# EAGLE board Atmoscan-ng (EAGLE 7.5.0)
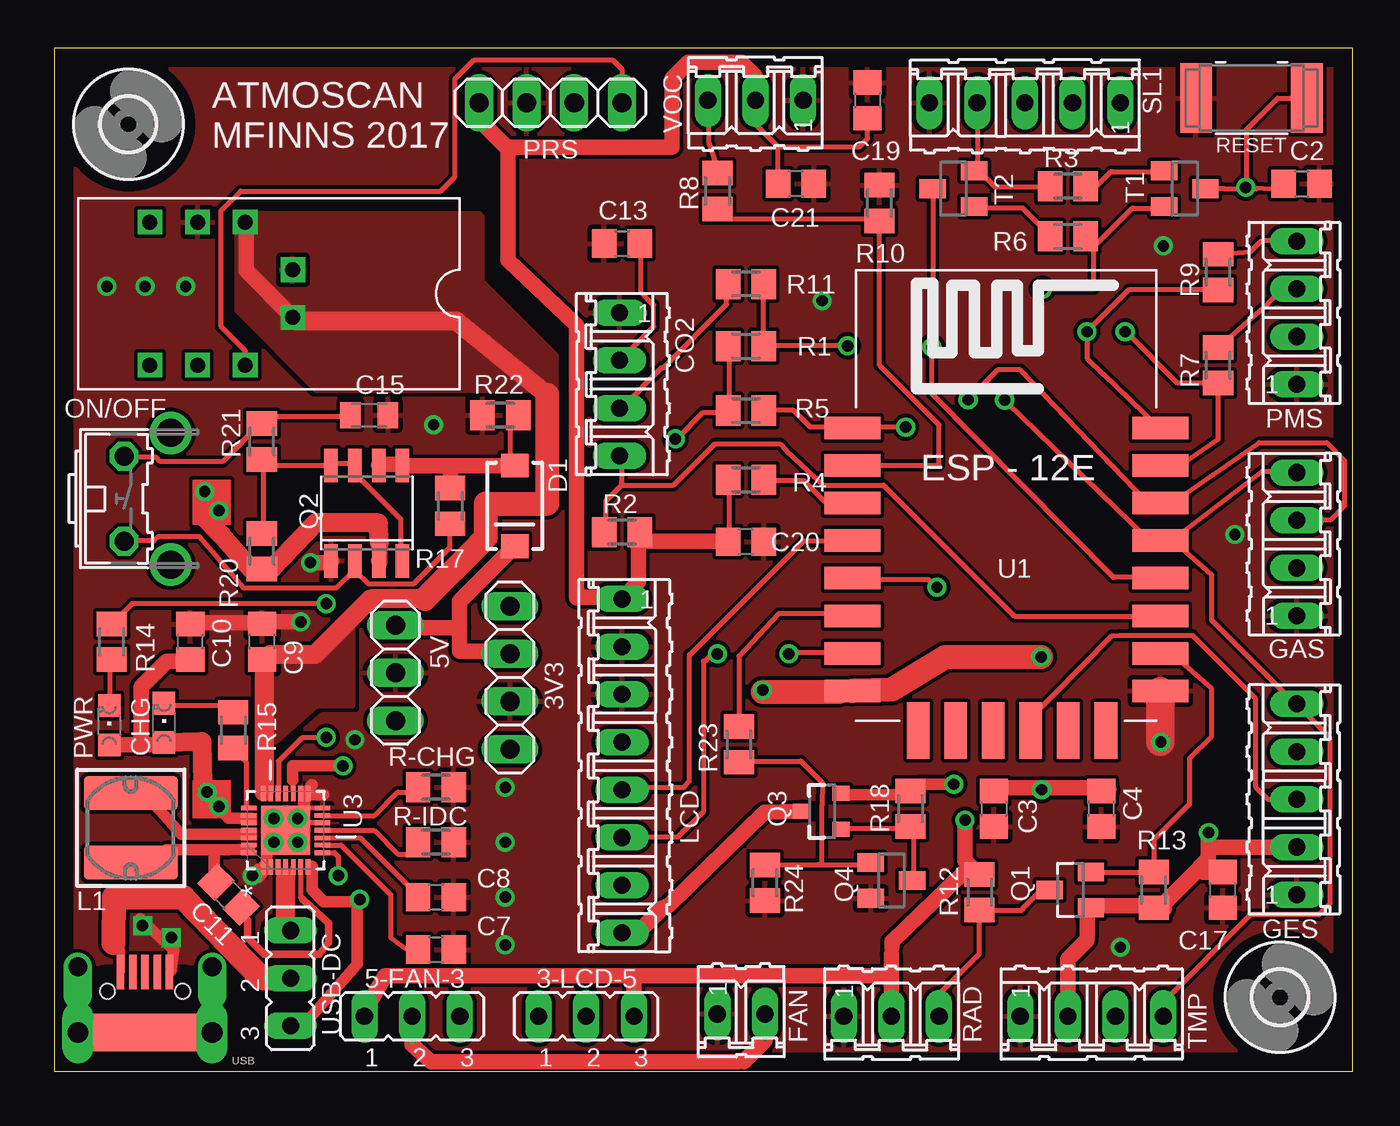
[diagram p0: board, top side]
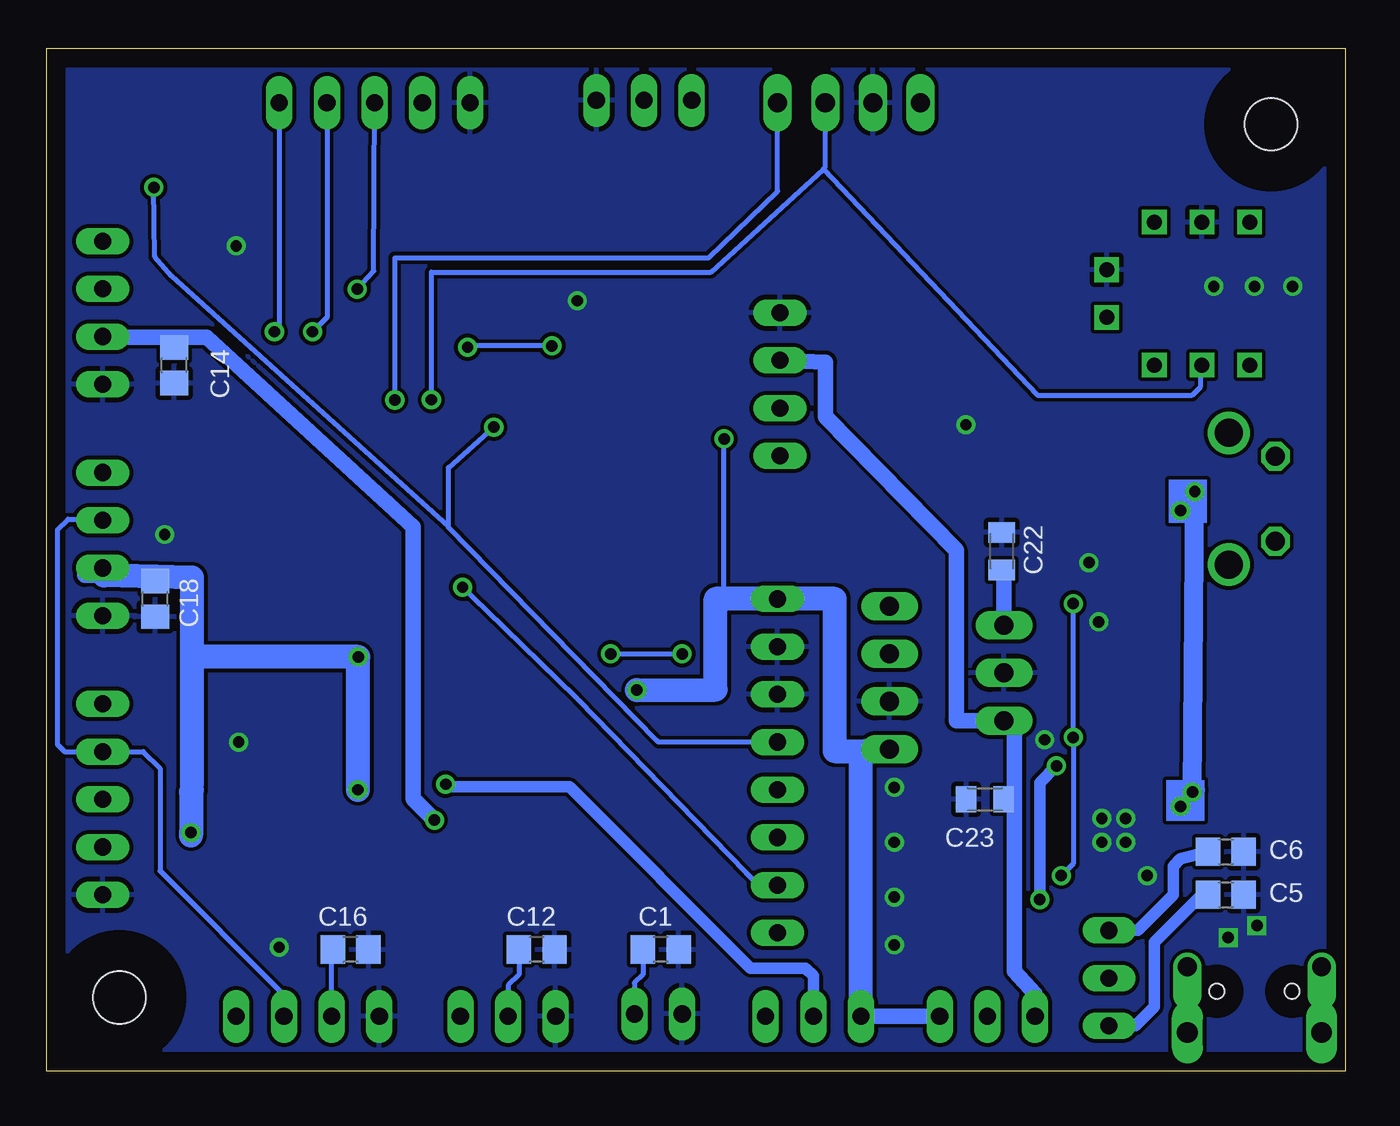
[diagram p1: board, bottom side, seen from below]

Size 69.14 x 54.47 mm. Coordinates in mm from the lower left corner, seen from the top.
Outline: 69.14,0 69.14,54.47 0,54.47 0,0 69.14,0
Copper layers (1*16): Top 0.035mm / dielectric 1.5mm / Bottom 0.035mm
Design rules "default": minimum track width 10mil, minimum drill 24mil, track to track 8mil, track to pad 8mil, pad to pad 8mil, via to via 8mil, smd to smd 8mil, copper to edge 40mil, drill to drill 8mil, minimum pad ring 10mil, minimum via ring 8mil, stop-mask expansion 4mil, vias tented up to drill 0mil, thermal gap 10mil
Net classes: 1 power: width 0.61 mm; 2 hipower: width 0.813 mm

## Footprints (pad centres in the part's own frame; a part is rotated, then mirrored left to right if it is on the bottom)
JP2 = drill 0.914 long: 1 -2.54,0; 2 0,0; 3 2.54,0
1X04 = drill 1.016 long: 1 -3.81,0; 2 -1.27,0; 3 1.27,0; 4 3.81,0
1X03 = drill 1.016 long: 1 -2.54,0; 2 0,0; 3 2.54,0
C0805 = smd 1.3 x 1.5: 1 -0.95,0; 2 0.95,0
C0805K = smd 1.1 x 1.4: 1 -1,0; 2 1,0
CHIPLED_0805 = smd 1.2 x 1.2: A 0,-1.05; C 0,1.05
04P = drill 0.914 long: 1 -3.81,0; 2 -1.27,0; 3 1.27,0; 4 3.81,0
SMA-403D = smd 1.27 x 1.47: A -2.15,0; C 2.15,0
02P = drill 0.914 long: 1 -1.27,0; 2 1.27,0
05P = drill 0.914 long: 1 -5.08,0; 2 -2.54,0; 3 0,0; 4 2.54,0; 5 5.08,0
SDR0503 = smd 5 x 1.8: 1 0,1.85; 2 0,-1.85
08P = drill 0.914 long: 1 -8.89,0; 2 -6.35,0; 3 -3.81,0; 4 -1.27,0; 5 1.27,0; 6 3.81,0; 7 6.35,0; 8 8.89,0
B3F-31XX = drill 1.016 octagon: 1 -2.261,-1.245; 2 2.261,-1.245 | drill 1.499 pad 2.159: 3 -3.505,1.245; 4 3.505,1.245
SOT-23 = smd 1 x 1.4: 1 -0.95,-1.1; 2 0.95,-1.1; 3 0,1.1
SO08-IRF = smd 0.72 x 1.78: 1 -1.905,-2.543; 2 -0.635,-2.543; 3 0.635,-2.543; 4 1.905,-2.543; 5 1.905,2.543; 6 0.635,2.543; 7 -0.635,2.543; 8 -1.905,2.543
SOT23-3 = smd 0.8 x 0.9: 1 -0.95,-1; 2 0.95,-1; 3 0,1.1
SOT23 = smd 1 x 1.4: 1 -0.95,-1.1; 2 0.95,-1.1; 3 0,1.1
M0805 = smd 1.3 x 1.6: 1 -0.95,0; 2 0.95,0
03P = drill 0.914 long: 1 -2.54,0; 2 0,0; 3 2.54,0
BTN_CK_KSS = smd 1.7 x 3.7: P$1 -2.95,0; P$2 2.95,0
ESP12E-SMD = smd 3 x 1.2: ADC -8.3,3.8; CH_PD -8.3,1.8; GND 8.1,-8.2; GPIO0 8.1,-2.2; GPIO2 8.1,-4.2; GPIO4 8.1,-0.2; GPIO5 8.1,1.8; GPIO12 -8.3,-4.2; GPIO13 -8.3,-6.2; GPIO14 -8.3,-2.2; GPIO15 8.1,-6.2; GPIO16 -8.3,-0.2; RESET -8.3,5.8; RXD0 8.1,3.8; TXD0 8.1,5.8; VCC -8.3,-8.2 | smd 1.2 x 3: CS0 -4.8,-10.3; GPIO9 -0.8,-10.3; GPIO10 1.2,-10.3; MISO -2.8,-10.3; MOSI 3.2,-10.3; SCLK 5.2,-10.3
TOL-10617 = drill 0.8 square: ALT -3.81,-12.7; GND -3.81,-10.16; GND1 -1.27,-5.08; QST 3.81,-12.7; SCL 3.81,-10.16; SDA 3.81,-7.62; VBAT -3.81,-7.62; VBAT1 1.27,-5.08
QFN40P400X400X80-29N = smd 0.813 x 0.254: 1 -1.956,1.194; 2 -1.956,0.787; 3 -1.956,0.406; 4 -1.956,0; 5 -1.956,-0.406; 6 -1.956,-0.787; 7 -1.956,-1.194; 15 1.956,-1.194; 16 1.956,-0.787; 17 1.956,-0.406; 18 1.956,0; 19 1.956,0.406; 20 1.956,0.787; 21 1.956,1.194 | smd 0.254 x 0.813: 8 -1.194,-1.956; 9 -0.787,-1.956; 10 -0.406,-1.956; 11 0,-1.956; 12 0.406,-1.956; 13 0.787,-1.956; 14 1.194,-1.956; 22 1.194,1.956; 23 0.787,1.956; 24 0.406,1.956; 25 0,1.956; 26 -0.406,1.956; 27 -0.787,1.956; 28 -1.194,1.956 | smd 2.591 x 2.591: 29 0,0
2,8 = hole 2.8: 0,0
MICRO_USB_4_LEGS = smd 1.85 x 0.4: D+ 3.125,0; D- 3.125,0.65; GND 3.125,-1.3; ID 3.125,-0.65; VCC 3.125,1.3 | drill 1.1 pad 1.5 long: P$1 -0.1,3.575; P$2 -0.1,-3.575 | drill 1 pad 1.5 offset: P$3 3.4,3.575; P$5 3.4,-3.575 | smd 2 x 6: P$4 -0.1,0 | hole 0.8: 2.1,2; 2.1,-2

## Placement (x,y rotation side)
3-LCD-5  3-LCD-5  [JP2]  28.32,2.92 0 top
3V3  S7V8V3  [1X04]  24.26,20.95 270 top
5-FAN-3  5-FAN-3  [JP2]  19.05,2.92 0 top
5V  U1V10F5  [1X03]  18.16,21.21 270 top
C1  100nF  [C0805]  36.45,6.48 180 bottom
C2  100nF  [C0805]  66.42,47.24 0 top
C3  100uF  [C0805]  50.04,13.97 270 top
C4  100nF  [C0805]  55.75,13.97 90 top
C5  10uF  [C0805]  6.35,9.4 0 bottom
C6  10uF  [C0805]  6.35,11.68 0 bottom
C7  1uF  [C0805]  20.32,6.48 0 top
C8  150nF  [C0805]  20.32,9.27 0 top
C9  10uF  [C0805]  11.07,22.87 90 top
C10  10uF  [C0805]  7.24,22.86 90 top
C11  100nF  [C0805]  9.27,9.4 135 top
C12  100nF  [C0805]  43.05,6.48 180 bottom
C13  100nF  [C0805]  30.23,44.07 0 top
C14  100nF  [C0805]  62.36,37.59 90 bottom
C15  1uF  [C0805K]  16.76,34.92 0 top
C16  100nF  [C0805]  52.96,6.48 180 bottom
C17  100nF  [C0805]  62.23,9.65 90 top
C18  100nF  [C0805]  63.37,25.15 90 bottom
C19  100nF  [C0805]  43.31,51.69 270 top
C20  100nF  [C0805]  36.83,28.19 180 top
C21  100nF  [C0805]  39.5,47.24 180 top
C22  100uF  [C0805K]  18.29,27.69 90 bottom
C23  100uF  [C0805K]  19.18,14.48 180 bottom
CHG  CHG  [CHIPLED_0805]  5.84,18.54 0 top
CO2  J1  [04P]  30.1,36.58 270 top
D1  Shottky  [SMA-403D]  24.51,30.1 270 top
FAN  J7  [02P]  36.58,3.05 0 top
GAS  J3  [04P]  66.17,28.07 90 top
GES  J9  [05P]  66.17,14.48 90 top
L1  2.2uH  [SDR0503]  4.06,12.95 180 top
LCD  J6  [08P]  30.23,16.26 270 top
ON/OFF  SW2  [B3F-31XX]  4.95,30.48 270 top
PMS  J2  [04P]  66.17,40.39 90 top
PRS  J5  [1X04]  26.42,51.56 180 top
PWR  PWR  [CHIPLED_0805]  2.92,18.41 0 top
Q1  SI2302  [SOT-23]  54.1,9.65 90 top
Q2  IRF7319  [SO08-IRF]  16.64,29.72 0 top
Q3  SI2303  [SOT23-3]  40.89,13.84 90 top
Q4  SI2302  [SOT23]  44.58,10.16 270 top
R1  12K  [M0805]  36.83,38.61 180 top
R2  12K  [M0805]  30.23,28.7 0 top
R3  12K  [M0805]  53.98,47.12 0 top
R4  12K  [M0805]  36.83,31.5 180 top
R5  12K  [M0805]  36.83,35.18 180 top
R6  12K  [M0805]  53.98,44.45 180 top
R7  470  [M0805]  61.98,37.59 270 top
R8  220K  [M0805]  35.31,46.86 90 top
R9  470  [M0805]  61.98,42.55 270 top
R10  100K  [M0805]  43.94,46.23 270 top
R11  470  [M0805]  36.83,41.91 0 top
R12  10K  [M0805]  49.28,9.53 90 top
R13  10K  [M0805]  58.55,9.65 270 top
R14  560  [M0805]  3.05,22.86 270 top
R15  560  [M0805]  9.53,18.16 90 top
R17  10K  [M0805]  21.08,30.1 90 top
R18  470K  [M0805]  45.59,13.97 90 top
R20  10K  [M0805]  11.05,27.69 270 top
R21  100K  [M0805]  11.05,33.53 270 top
R22  10K  [M0805]  23.75,34.92 0 top
R23  22K  [M0805]  36.45,17.4 90 top
R24  470K  [M0805]  37.85,10.03 270 top
R-CHG  600  [M0805]  20.32,15.11 0 top
R-IDC  3K  [M0805]  20.32,12.19 0 top
RAD  J10  [03P]  44.58,2.92 0 top
RESET  SW2  [BTN_CK_KSS]  63.75,51.82 180 top
SL1  J7  [05P]  51.69,51.56 180 top
T1  S8050  [SOT23]  60.2,46.99 270 top
T2  S8050  [SOT23]  47.88,46.99 90 top
TMP  J4  [04P]  55.24,2.92 0 top
U1  ESP12E  [ESP12E-SMD]  50.8,28.45 0 top
U2  TOL-10617  [TOL-10617]  17.78,41.4 270 top
U3  MAX8903A  [QFN40P400X400X80-29N]  12.32,12.83 90 top
U$2  [2,8]  65.28,3.94 0 top
U$4  [2,8]  3.94,50.42 0 top
USB  MICRO-USB-B  [MICRO_USB_4_LEGS]  4.83,2.16 90 top
USB-DC  USB-DC  [JP2]  12.57,4.95 270 top
VOC  J8  [03P]  37.34,51.69 180 top

## Library data of the parts
3-LCD-5 5-FAN-3 USB-DC = jumper
3V3 5V PRS = pinhead
C1-C14 C16-C21 = rcl
C15 C22 C23 CHG PWR Q4 R1-R15 R17 R18 R20-R24 R-CHG R-IDC RESET = adafruit
CO2 FAN GAS GES LCD PMS RAD SL1 TMP VOC = con-amp-quick; OC_FARNELL: unknown; OC_NEWARK: unknown
D1 Q1 = Ai_DiscreteSemis
L1 = inductor-bourns
ON/OFF = switch-omron; MPN: B3F-3100; OC_FARNELL: 959704; OC_NEWARK: 36M3582
Q2 = lio
Q3 = fets; DIGIKEY: 568-10499-1-ND; MOUSER: 771-NX3008PBK,215; NEWARK: 74T4665
T1 T2 = transistor
U1 = esp8266modules
U2 = Marcello
U3 = Maxim_By_element14_Batch_1; MPN: MAX8903AETI+; OC_FARNELL: 1813114; OC_NEWARK: 71P2395; PACKAGE: TQFN-28; SUPPLIER: Maxim
U$2 U$4 = holes
USB = micro usb B - 4LEGS

## Nets
3.3V: 3-LCD-5.1 3V3.4 5-FAN-3.3 C3.1 C4.2 C16.2 C17.2 C18.2 C19.2 C20.2 C21.2 GAS.2 GES.2 LCD.1 PRS.4 Q1.1 R1.2 R2.2 R4.2 R5.2 R13.2 TMP.2 U1.VCC VOC.2
5V: 3-LCD-5.3 5-FAN-3.1 5V.3 C12.2 C13.2 C14.2 C23.1 CO2.2 PMS.2 R12.2 RAD.2
_GESINT: GES.3 U1.GPIO10
ADC: R8.1 R10.2 U1.ADC
D/C: LCD.5 U1.GPIO16
DTR: R3.1 SL1.4 T2.2
EN: R4.1 U1.CH_PD
GND: 3V3.3 5V.2 C1.1 C2.2 C3.2 C4.1 C5.2 C6.2 C7.2 C8.2 C9.2 C10.2 C12.1 C13.1 C14.1 C15.2 C16.1 C17.1 C18.1 C19.1 C20.1 C21.1 C22.2 C23.2 CO2.1 FAN.1 GAS.1 GES.1 LCD.2 LCD.3 PMS.1 PRS.3 Q2.1 Q4.2 R10.1 R22.1 R24.2 R-CHG.2 R-IDC.2 RAD.1 RESET.P$2 SL1.5 TMP.1 U1.GND U2.GND U2.GND1 U3.1 U3.2 U3.12 U3.14 U3.15 U3.16 U3.29 USB.GND VOC.1
GPIO0: R1.1 R11.2 T2.3 U1.GPIO0
HW_RX: PMS.3 R7.1
HW_TX: PMS.4 R9.1
LED: R23.2 U1.GPIO12
MOSI: LCD.6 U1.GPIO13
N$1 [power]: 3-LCD-5.2 Q3.2 R18.2
N$3 [hipower]: LCD.8 Q3.3
N$4: C15.1 ON/OFF.1 R21.1
N$5: C11.2 L1.1 U3.27 U3.28
N$6: C11.1 U3.6
N$7: C8.1 U3.10
N$8: Q3.1 Q4.3 R18.1
N$9: R14.1 U3.8 U3.19
N$10: C7.1 U3.9
N$11: R6.2 T2.1
N$12 [hipower]: D1.A Q2.5 Q2.6 R17.2 R22.2
N$13: ON/OFF.2 Q2.2 R17.1
N$14: Q4.1 R23.1 R24.1
N$15: R15.1 U3.22
N$16: PWR.C R14.2
N$17: CHG.C R15.2
N$18: L1.2 U3.25 U3.26
N$19: R-CHG.1 U3.13
N$20: R-IDC.1 U3.11
N$22: R3.2 T1.1
N$23: 5-FAN-3.2 C1.2 FAN.2
N$26: Q2.4 Q2.7 Q2.8 R20.1 R21.2
RADINT: Q1.2 R13.1 U1.GPIO15
RADINT5: Q1.3 R12.1 RAD.3
RST: C2.1 LCD.4 R5.1 RESET.P$1 T1.3 U1.RESET
RTS: R6.1 SL1.3 T1.2
RX: R7.2 SL1.1 U1.RXD0
SCK: LCD.7 U1.GPIO14
SCL: GAS.3 GES.4 PRS.2 TMP.3 U1.GPIO5 U2.SCL
SDA: GAS.4 GES.5 PRS.1 TMP.4 U1.GPIO4 U2.SDA
SW_RX: CO2.3 R11.1
SW_TX: CO2.4 R2.1 U1.GPIO2
SYS: C10.1 CHG.A PWR.A Q2.3 R20.2 U3.23 U3.24
TX: R9.2 SL1.2 U1.TXD0
USB: USB-DC.2 USB.VCC
VBAT [hipower]: C9.1 U2.VBAT U2.VBAT1 U3.20 U3.21
VDC: C6.1 U3.3 U3.4 U3.5 USB-DC.1
VOC: R8.2 VOC.3
VUNREG [hipower]: 3V3.2 5V.1 C22.1 D1.C
VUSB [power]: C5.1 U3.7 U3.17 USB-DC.3

## Tracks (layer width: path | path; a pad name or v marks a point on that pad's centre or on a via)
3.3V  (via drill 0.61)
  Top 0.254: 35.93,31.43 35.93,28.23 | C21.2 38.55,49.22 | R1.2 35.92,38.51 35.92,35.19 R5.2 35.8,35.08 34.54,35.08 33.17,33.71 v33.07,33.67 | 37.4,51.42 37.4,51.31 | 37.4,51.31 37.4,50.36 38.55,49.22 | 38.55,49.22 42.87,49.22 43.31,49.66 C19.2 | 37.4,51.31 VOC.2 | 24.17,49.2 24.08,49.2 | 22.73,51.44 PRS.4 | 41.76,20.19 41.91,20.34 | 52.6,15.09 52.6,15.07 v52.58,14.99 | 60.83,10.67 60.96,10.79 61.15,10.6 | 61.72,11.94 61.47,11.68
  Top 0.813: C3.1 50.44,15.09 52.6,15.09 55.36,15.09 C4.2 56.16,14.97 | 35.93,28.23 C20.2 35.57,28.22 31.46,28.22 R2.2 31.11,28.68 31.11,26.05 30.32,25.25 LCD.1 29.86,25.25 27.81,25.25 | 35.93,31.43 R4.2 | 41.41,20.34 41.91,20.34 42.44,20.34 U1.VCC | 27.81,25.2 27.81,25.25 | 27.81,25.25 27.81,39.71 24.17,43.18 24.17,49.2 32.91,49.2 32.91,52.84 33.78,53.72 36.58,53.72 37.34,52.96 VOC.2 37.4,51.65 | 37.72,20.19 v37.72,20.3 | 60.83,10.67 59.12,8.95 59.12,8.65 R13.2 58.45,8.8 55.47,8.8 Q1.1 55.02,8.34 55,7.99 55,7.3 54.99,6.99 53.98,5.97 TMP.2 | 43.23,50.74 C19.2 | 24.08,49.2 22.73,50.55 22.73,51.44 | 60.96,10.79 61.47,11.3 61.47,11.68 v61.47,12.7 | C17.2 61.15,10.6 | GES.2 61.72,11.94
  Top 1.27: v52.55,22.06 47.45,22.06 44.56,20.32 U1.VCC | 37.72,20.19 41.76,20.19
  Bottom 0.254: 33.07,25.15 v33.07,33.67 | TMP.2 53.98,6.39 | 25.78,16.79 25.53,17.04 | 61.47,12.55 61.79,12.23 | 61.37,22.06 61.4,22.1 | 52.58,22.04 v52.55,22.06 | 3-LCD-5.1 25.86,2.96 25.78,3.05
  Bottom 0.813: 66.1,26.4 67.13,26.4 GAS.2 | 24.26,17.04 3V3.4 | 33.07,25.15 33.02,25.15 | 53.98,6.39 C16.2 | C18.2 63.35,26.16 63.34,26.33 | 61.4,15.53 61.4,14.97 | 61.47,14.86 61.52,14.85 61.43,14.97 | 5-FAN-3.3 3-LCD-5.1
  Bottom 1.27: 61.43,14.97 61.4,14.97 | 66.1,26.4 63.34,26.33 61.4,26.28 61.4,22.1 61.4,15.53 61.4,15.32 | v37.72,20.3 33.53,20.32 33.53,25.15 33.02,25.15 LCD.1 27.18,25.15 27.18,17.04 25.53,17.04 24.26,17.04 | 25.78,3.05 25.78,16.79 | 61.47,14.86 v61.47,12.7 61.47,12.55 | v52.55,22.06 61.37,22.06 | v52.58,14.99 52.58,22.04
5V  (via drill 0.61)
  Top 0.254: 44.5,1.83 RAD.2 | 44.6,6.6 44.58,6.22 | C13.2 31.23,43.99 31.23,41.48 31.91,40.79 31.91,39.65 30.2,37.94 CO2.2 | 30.99,5.08 30.86,4.95
  Top 0.813: 44.73,2.17 RAD.2 44.58,5.08 | 44.6,6.6 44.6,6.88 48.39,10.54 48.51,10.54 48.84,10.87 | v48.5,13.37 48.5,11.2 48.84,10.87 | 48.84,10.87 49.19,10.52 R12.2 | 5-FAN-3.1 16.38,2.97 17.6,5.08 30.86,5.08 30.86,4.95 3-LCD-5.3 30.86,2.79 | 44.58,6.22 44.58,5.08 | 44.58,5.08 30.99,5.08
  Bottom 0.254: C14.2 62.32,38.62 62.32,39.09 | C12.2 44,5.15 44.58,4.57 RAD.2 | C23.1 17.6,14.48
  Bottom 0.813: v48.5,13.37 49.64,14.52 49.64,28.99 60.63,39.09 62.32,39.09 66.45,39.09 PMS.2 | CO2.2 27.67,37.76 27.67,34.84 20.7,27.74 20.7,18.67 5V.3 17.6,18.11 17.6,14.48 17.6,5.33 16.51,4.12 5-FAN-3.1
_GESINT
  Top 0.254: U1.GPIO10 52.05,18.17 52.05,18.86 53.19,20 56.33,23.18 56.73,23.2 60.62,23.2 63.97,19.85 63.97,15.15 64.64,14.48 GES.3
ADC
  Top 0.254: R8.1 35.36,45.83 35.81,45.38 43.93,45.38 R10.2 43.94,37.59 47.12,34.42 47.12,32.26 U1.ADC 42.56,32.23
D/C
  Top 0.254: 42.44,28.23 U1.GPIO16 42.33,28.23 39.92,28.23 33.86,22.17 33.81,22.17 33.81,15.42 33.5,15.1 30.34,15.1 LCD.5
DTR
  Top 0.254: 49.07,48.01 T2.2 | R3.1 53.53,47.09 50.1,47.09 49.19,48.01 T2.2 | SL1.4 49.15,48.11 T2.2
EN
  Top 0.254: 41.19,30.29 42.44,30.29 U1.CH_PD 41.07,30.29 39.93,31.43 37.87,31.43 R4.1
GND  (via drill 0.6, 0.61)
  Top 0.254: 11.3,11.81 11.38,11.73 12.27,12.75 U3.29 | 11.25,10.87 11.3,10.92 10.79,10.92 v10.54,10.41 | 13.18,13.66 12.97,13.45 12.5,12.98 U3.29 | U3.29 11.73,12.23 v11.68,12.19 | U3.12 13.49,13.23 13.46,13.21 13.21,13.21 | 13.08,13.59 13.18,13.64 13.41,13.77 13.49,13.66 12.88,13.99 13.09,14 | U3.14 13.09,14 | 13.09,14 13.09,14.78 U3.16 U3.15 | 13.34,14.1 13.46,13.97 13.34,14.73 | USB.GND 6.22,5.38
  Top 0.61: 11.3,11.81 11.3,10.92 | 13.34,14.73 13.72,15.24 | v10.54,10.41 10.79,10.41 | 13.34,14.1 13.34,14.73 | 13.34,14.73 14.35,14.73 | 6.22,5.38 6.35,6.48 4.57,8.13
  Top 0.813: 58.9,20.23 U1.GND | 17.87,34.98 C15.2 | 22.67,34.98 R22.1 | C10.2 7.24,23.89 11.01,23.89 C9.2 11.07,23.93 v13.12,23.93 | v13.64,27.08 14.67,27.08 14.77,27.19 Q2.1 | 58.9,17.55 v58.93,17.53 | 37.74,28.11 C20.1 | 13.21,13.21 13.06,13.36 U3.29 | v11.68,13.46 U3.29 | v12.95,12.19 U3.29 | v12.95,13.46 12.97,13.45 | 13.18,13.66 13.18,13.64 | 10.79,10.41 11.18,10.79
  Top 1.524: 58.9,20.23 58.9,17.55
  other vias: 2.79,41.78 4.83,41.78 6.99,41.78 24,15.11 24,12.19 24,9.27 24,6.73 20.19,34.42 40.89,41.02 59.05,43.94 56.77,6.6 62.87,28.57 16,17.65 4.7,7.75 6.22,7.11
  pour Bottom: -0.13,54.48 69.09,54.48 69.09,0 0,0
  pour Top (rank 6): 0,0 0.25,54.48 69.09,54.48 69.22,0
GPIO0  (via drill 0.61)
  Top 0.254: T2.3 46.79,46.86 46.79,38.59 v46.74,38.54 46.74,36.07 56.39,26.29 58.79,26.29 U1.GPIO0 | R11.2 37.74,41.82 37.74,38.62 R1.1 37.86,38.62 v42.24,38.62
  Bottom 0.254: v42.24,38.62 46.74,38.62 v46.74,38.54
HW_RX
  Top 0.254: R7.1 64.64,40.89 65.41,41.66 PMS.3
HW_TX
  Top 0.254: R9.1 63.69,43.62 64.26,44.2 64.38,44.22 66.09,44.22 PMS.4
LED
  Top 0.254: U1.GPIO12 42.44,24.35 38.57,24.35 36.45,22.1 R23.2
MOSI  (via drill 0.61)
  Top 0.254: U1.GPIO13 42.56,22.29 43.13,22.29 39.56,22.28 39.47,22.29 39.13,22.29 v39.12,22.23 | v35.31,22.23 35.05,22.23 34.67,21.84 34.56,21.83 34.56,13.82 33.2,12.46 LCD.6
  Bottom 0.254: v39.12,22.23 v35.31,22.23
N$1  (via drill 0.61)
  Top 0.61: 45.29,14.82 45.3,15.2 45.41,15.09 | R18.2 45.41,15.09 | v47.9,15.28 45.95,15.28 45.74,15.07 R18.2 | 41.86,14.73 41.97,14.73 | 41.97,14.73 45.41,14.73 R18.2 | 45.41,15.09 45.4,15.07 R18.2 | 41.97,14.73 Q3.2
  Bottom 0.61: v47.9,15.28 47.77,15.14 41.3,15.14 31.66,5.49 28.73,5.49 28.32,5.08 3-LCD-5.2
N$3
  Top 0.813: 39.7,13.83 Q3.3 37.81,13.78 32.73,8.83 32.37,8.67 31.11,7.42 30.32,7.42 LCD.8
N$4
  Top 0.254: C15.1 15.7,34.86 11.47,34.86 11.12,34.52 R21.1 11.01,34.52 8.95,32.46 5.64,32.46 5.41,32.69 3.81,32.69 ON/OFF.1
N$5
  Top 0.254: 5.94,11.79 5.84,11.68 | 10.11,11.79 U3.27 | U3.28 U3.27 | 10.22,11.82 U3.27 | 9.26,11.79 9.26,11.8 | C11.2 8.51,9.82
  Top 0.61: 5.84,11.68 5.08,11.1 L1.1 | 5.94,11.79 8.51,11.79 | 10.22,11.82 10.39,11.82 9.26,11.8 | 8.51,11.79 9.26,11.79 | 8.51,9.82 8.51,11.79
N$6
  Top 0.254: U3.6 13.11,9.25 13.21,9.14
  Top 0.406: 13.21,9.14 14.61,7.87 14.61,6.86 14.1,6.22 11.18,6.22 10.29,7.11 10.29,8 C11.1
N$7
  Top 0.254: U3.10 16.28,12.42 19.56,9.14 19.56,8.83 C8.1
N$8
  Top 0.254: Q4.3 45.76,10.74 45.76,12.84 45.74,12.9 45.63,12.9 R18.1 45.53,12.92 41.99,12.92 Q3.1
N$9  (via drill 0.61)
  Top 0.254: U3.19 11.94,14.81 11.94,16.51 13.21,17.78 v14.48,17.78 | R14.1 3.05,23.88 | 15.11,10.29 v15.11,10.41 15.11,11.43 14.91,11.63 U3.8 | 3.05,23.62 R14.1 | v14.48,24.89 4.13,24.89 R14.1
  Bottom 0.254: v14.48,24.89 v14.48,17.78 14.48,11.05 v15.11,10.41
N$10
  Top 0.254: U3.9 15.27,12.04 17.91,9.4 17.91,7.11 18.8,6.48 C7.1
N$11
  Top 0.254: T2.1 49.07,45.95 51.59,45.95 53.53,44.01 R6.2
N$12
  Top 0.254: R22.2 24.61,34.86 24.27,34.52 24.27,32.35 D1.A 24.16,32.23 | 21.07,31.09 R17.2 20.8,32.23 | 18.55,32.23 Q2.5 18.33,32.32
  Top 0.813: 21.09,32.23 21.07,31.09 | 18.55,32.23 20.8,32.23 21.09,32.23 | 18.33,32.32 17.3,32.32 17.29,32.33 Q2.6 | 21.09,32.23 24.16,32.23
N$13
  Top 0.254: R17.1 21.07,29.15 21.07,27.89 19.13,25.95 16.73,25.95 16.04,26.63 16.04,27.09 Q2.2 15.93,26.63 15.01,25.72 10.1,25.72 7.73,28.46 5.52,28.46 5.3,28.23 3.81,28.23 ON/OFF.2
N$14
  Top 0.254: R24.1 40.64,10.98 | 40.64,10.98 43.35,10.98 Q4.1 | 40.64,10.98 40.87,11.01 40.87,14.15 40.89,15.37 39.75,16.51 36.45,16.51 R23.1
N$15
  Top 0.254: U3.22 10.21,14.12 10.21,16.48 9.53,17.17 R15.1
N$16
  Top 0.254: 2.92,19.94 PWR.C 2.93,19.96 2.93,21.79 R14.2
N$17
  Top 0.254: CHG.C 5.87,19.46 9.3,19.46 9.53,19.23 R15.2
N$18
  Top 0.254: U3.26 10.44,12.52 10.44,12.75 U3.25 10.46,12.62
  Top 0.61: 10.46,12.62 6.76,12.62 5.38,14.12 L1.2
N$19
  Top 0.254: U3.13 17.04,13.61 18.29,14.86 19.5,14.86 R-CHG.1
N$20
  Top 0.254: U3.11 17.02,12.83 18.29,11.56 19.5,11.56 R-IDC.1
N$22
  Top 0.254: R3.2 55.47,47.09 56.27,47.89 56.38,47.88 59,47.88 T1.1
N$23
  Top 0.61: 36.45,0.51 36.7,0.51
  Top 0.813: 5-FAN-3.2 19.05,1.4 20.07,0.51 36.45,0.51 | 36.7,0.51 37.85,1.65 FAN.2
  Bottom 0.254: 37.4,6.04 37.4,5.15 37.85,4.7 FAN.2
  Bottom 0.61: C1.2 37.4,6.04
N$26
  Top 0.254: 14.73,32.78 Q2.8 | 15.99,32.78 Q2.7 | R20.1 11.12,28.69 11.12,32.58 R21.2 11.24,32.23 14.67,32.23 Q2.8 | Q2.4 18.44,27.2 18.44,29.38 16.04,31.77 16.04,32.23 Q2.7 | Q2.8 14.78,32.35 15.93,32.35 Q2.7
RADINT
  Top 0.254: Q1.2 R13.1 | 58.56,10.63 R13.1 | U1.GPIO15 58.9,22.17 59.59,22.17 61.61,20.41 61.61,17.79 60.45,16.64 60.45,14.22 58.55,12.32 R13.1
RADINT5
  Top 0.254: 47.13,1.83 RAD.3 47.13,1.94 47.13,4.12 49.26,6.25 49.26,8.56 R12.1 51.54,8.57 51.59,8.69 52.5,9.6 52.96,9.6 Q1.3
RST  (via drill 0.61)
  Top 0.254: v45.34,34.29 42.67,34.29 U1.RESET 42.56,34.29 40.26,34.29 39.37,35.18 R5.1 | T1.3 62.33,46.98 64.03,46.98 v63.45,47.05 | 65.88,47.21 C2.1 65.79,46.93 v63.45,47.05 | v63.45,47.05 63.58,47.08 63.5,47.08 63.5,50.16 65.15,51.82 RESET.P$1
  Bottom 0.254: 47.75,28.99 47.75,28.96 36.65,17.6 36.58,17.53 LCD.4 | 47.75,28.99 47.75,32.13 v45.34,34.29 | v63.45,47.05 63.4,43.37 62.48,42.33 47.75,28.99
RTS  (via drill 0.61)
  Top 0.254: v52.62,41.64 52.7,41.66 55.37,41.66 55.37,43.94 R6.1 55.47,44.01 57.42,45.95 57.52,45.94 59,45.94 T1.2
  Bottom 0.254: v52.62,41.64 51.73,42.6 SL1.3
RX  (via drill 0.61)
  Top 0.254: U1.RXD0 58.9,32.23 59.93,32.23 61.98,33.64 R7.2 59.81,36.64 57.09,39.37 v57.02,39.37
  Bottom 0.254: 57.28,39.37 v57.02,39.37 56.77,39.5 SL1.1
SCK  (via drill 0.61)
  Top 0.254: U1.GPIO14 42.56,26.18 46.56,26.18 46.9,25.83 v47,25.77
  Bottom 0.254: v47,25.77 45.73,24.55 40.96,19.9 40.84,19.77 31.9,10.58 31.9,10.57 31.24,9.91 LCD.7
SCL  (via drill 0.61)
  Top 0.254: v48.67,35.75 50.25,37.34 51.44,37.34 58.22,30.29 58.79,30.29 U1.GPIO5 59.02,30.29 59.59,30.29 64.16,33.47 67.75,33.47 68.71,32.51 68.71,30.1 67.94,29.34 GAS.3
  Bottom 0.254: 27.79,48.02 33.78,42.55 48.67,42.55 v48.67,35.75 | 27.79,48.02 27.69,48.13 PRS.2 | 27.79,48.02 16.4,35.99 8.14,35.99 7.68,36.45 7.68,37.59 U2.SCL | GAS.3 66.23,29.4 68.01,29.4 68.58,28.83 68.58,17.4 68.2,17.02 GES.4 64.01,17.02 63.12,16.13 63.12,10.67 56.64,4.19 56.64,3.05 TMP.3
SDA  (via drill 0.61)
  Top 0.254: U1.GPIO4 59.02,28.23 59.47,28.23 64.33,31.94 66.1,31.94 GAS.4 | 66.14,19.51 61.62,24.03 61.62,26.45 59.59,28.23 U1.GPIO4 | 66.14,19.51 66.67,18.97 66.74,18.97 67.92,17.79 67.92,8.9 67.35,8.33 63.7,8.33 59.05,3.68 TMP.4 | U1.GPIO4 58.79,28.35 58.22,28.35 50.7,35.61 50.66,35.65 v50.61,35.74 | U2.SDA 10.16,38.35 8.89,39.62 8.89,45.85 9.91,46.86 20.57,46.86 21.34,47.62 21.34,52.83 22.35,53.85 29.72,53.85 30.23,53.34 PRS.1 | GES.5 66.18,19.55 66.14,19.51
  Bottom 0.254: PRS.1 30.23,46.86 33.91,43.31 50.61,43.31 v50.61,35.74
SW_RX
  Top 0.254: R11.1 35.8,41.82 35.8,40.83 32.41,37.44 32.37,37.48 30.2,35.31 CO2.3
SW_TX
  Top 0.254: U1.GPIO2 58.79,24.23 51.13,24.23 44.16,31.2 40.96,31.2 39,33.03 38.63,33.4 35.18,33.4 32.98,31.2 30.33,31.2 30.32,31.19 30.21,31.2 | 30.21,31.2 29.36,30.35 29.36,28.78 R2.1 29.29,28.79 | 30.21,31.2 30.2,31.3 30.2,32.68 CO2.4
SYS  (via drill 0.61)
  Top 0.254: 2.9,17.17 PWR.A 2.82,17.11 | 7.91,15.3 v8.13,14.86 | U3.24 U3.23 10.46,13.46 | v8.76,14.1 8.6,14.28 8.84,14.01
  Top 0.61: 8.84,14.01 9.27,13.46 10.46,13.46
  Top 0.813: 11.58,26.75 11.12,26.75 R20.2 10.47,26.74 | 17.31,28.12 17.31,27.08 Q2.3 | 4.61,17.37 5.52,17.37 CHG.A | 4.61,17.37 3.01,17.37 PWR.A | 4.61,17.37 4.61,20.46 5.98,21.83 7.24,21.83 C10.1 | 8.84,14.01 v8.13,14.86
  Top 1.016: 11.58,26.75 13.91,29.2 17.25,29.2 17.31,28.12 | CHG.A 7.86,17.55 7.91,15.3 | 10.47,26.74 8.89,28.57 8,29.46 v8,30.86 v8.76,29.84
  Bottom 0.813: v8.13,14.86 7.87,14.99
  Bottom 1.016: v8.13,14.86 v8,30.86
TX  (via drill 0.61)
  Top 0.254: U1.TXD0 58.79,34.29 55.85,37.1 54.99,37.96 v54.99,39.37 57.22,41.59 R9.2
  Bottom 0.254: SL1.2 54.23,40.13 v54.99,39.37
USB
  Top 0.254: USB.VCC 3.56,5.28 | 3.56,6.48 3.54,6.51 3.15,6.83
  Top 0.406: 3.56,5.28 3.56,6.48
  Top 1.27: 3.15,6.83 3.17,9.27 6.86,9.27 11.05,4.95 USB-DC.2
VBAT
  Top 0.254: U3.20 U3.21 11.16,14.86 | 11.39,22.14 C9.1 11.16,21.91
  Top 0.813: U2.VBAT 10.21,45.15 10.21,42.63 12.61,40.23 U2.VBAT1 12.89,39.94 | 11.47,22.17 C9.1 | 26.24,30.23 26.24,30.35 | 22.61,28.04 22.77,27.88 22.99,28.45
  Top 1.016: 11.16,21.91 11.16,14.86 | 11.47,22.17 13.87,22.17 16.84,25.15 19.72,25.15 | 26.24,30.35 26.24,30.26 | 26.24,36.01 21.41,39.94 12.89,39.94
  Top 1.27: 22.77,28.19 22.61,28.04 19.72,25.15 | 26.24,36.01 26.24,30.35 | 22.99,28.45 22.99,30.23 26.24,30.23
  pour Top: 10.79,22.48 14.22,22.35 15.88,23.88 15.88,19.43 13.97,19.43 11.81,17.53 10.79,17.53
  pour Top (isolate 0.254, no thermals): 10.16,45.59 22.61,45.59 22.73,45.47 22.73,41.91 22.86,41.91 26.67,38.1 26.67,36.45 26.54,36.32 13.97,36.32 9.78,40.51 9.78,45.21
VDC
  Top 0.254: U3.3 11.94,10.87 11.94,10.29 12.32,10.29 | 12.32,10.29 U3.4 | U3.5 12.7,10.87 12.7,10.29 12.32,10.29
  Top 1.016: USB-DC.1 12.32,7.75 12.32,10.29
  Bottom 0.61: USB-DC.1 11.05,7.49 9.14,9.4 9.14,10.92 8.76,11.3 C6.1
VOC
  Top 0.254: R8.2 35.36,47.89 34.85,49.48 34.82,50.34 VOC.3
VUNREG
  Top 0.813: 21.59,23.62 21.59,22.36 24.26,22.36 3V3.2 | 21.59,23.62 21.59,25.03 D1.C | 5V.1 18.29,23.62 21.59,23.62
  Bottom 0.813: C22.1 18.16,26.69 5V.1
VUSB  (via drill 0.61)
  Top 0.254: 13.72,10.92 U3.7 | 12.7,15.49 12.7,15.06 U3.17
  Top 0.61: 13.72,10.92 13.72,9.65 14.35,9.02 16.13,9.02 | v15.37,16.26 12.7,16.26 12.7,15.49 | 16.13,9.02 v16.26,9.14 | 16.13,9.02 16.13,5.71 13.21,2.41 USB-DC.3
  Bottom 0.61: v16.26,9.14 16.26,15.37 v15.37,16.26 | C5.1 7.62,9.4 10.16,6.86 10.16,3.43 11.18,2.41 USB-DC.3
(copper drawn outside any net)
  shapes: Bottom area x2, Top area x2

## Text on the board
tNames: ATMOSCAN / MFINNS 2017